# Altium PCB DiPho_AFE.PcbDoc (part 2 of 2)
Units mm, origin at the board's own origin, x right, y up, seen from the top; angles counter-clockwise.
Board outline 25.2 x 25.2 mm, 4 copper layers (Top Layer, Inner Layer 1, Inner Layer 2, Bottom Layer), stack 1.51 mm thick; 66 components, 49 nets, 237 pads, 102 vias.
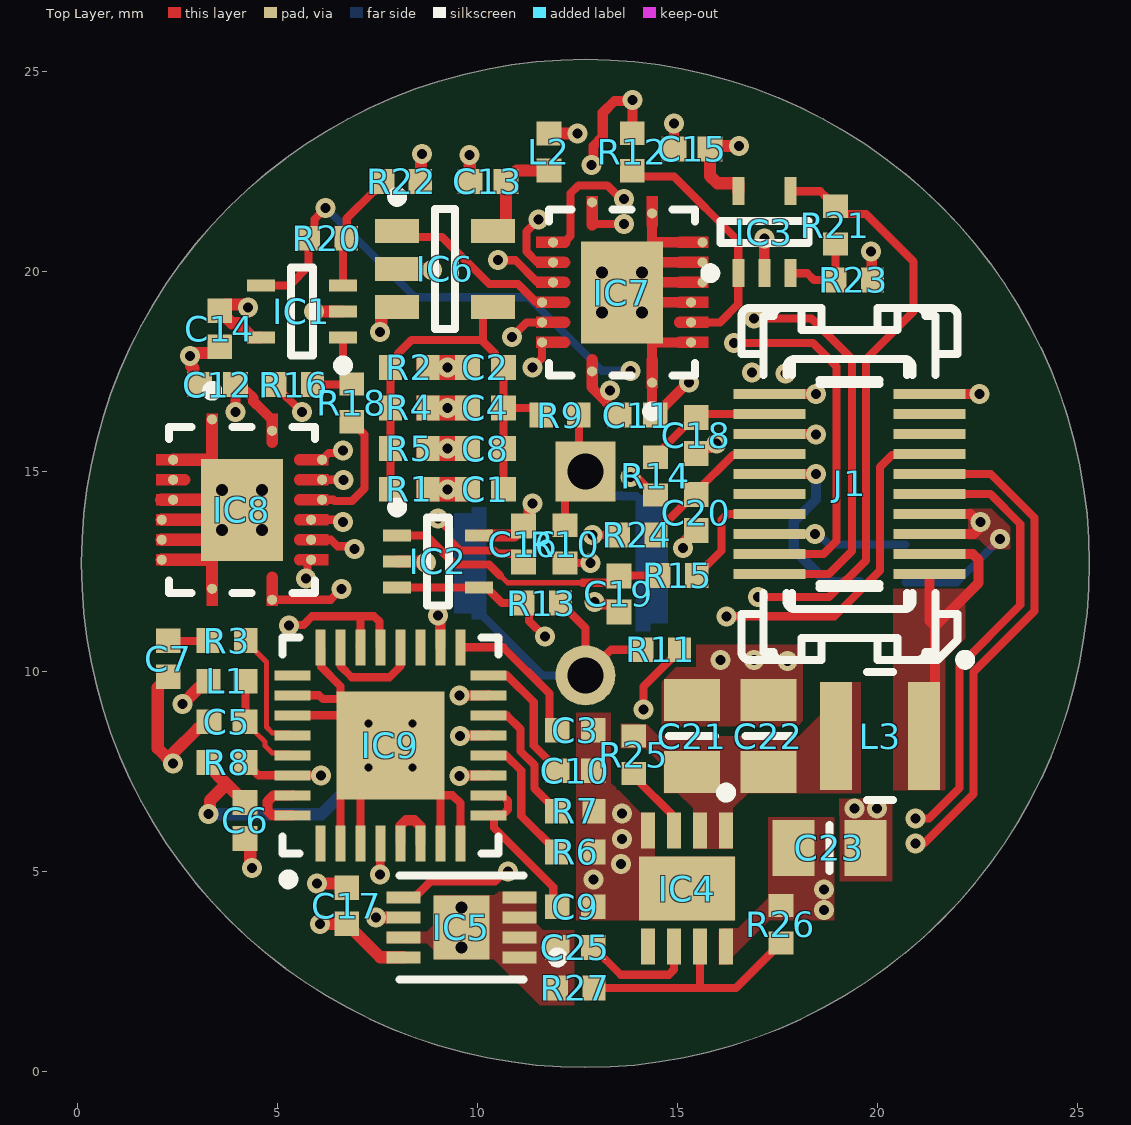
[diagram p0: Top Layer view]

## Via types
v1: diameter 0.5, hole 0.25, Top Layer to Bottom Layer, tented both sides, 88 vias
v2: diameter 0.6, hole 0.3, Top Layer to Bottom Layer, 10 vias
v3: diameter 0.5, hole 0.2, Top Layer to Bottom Layer, tented both sides, 4 vias

## Nets (pads, with @x,y where several pads share a name; then routed paths per layer and width w, separated by ;. In a path a pad name is that pad's centre, name@x,y a point inside that pad or via, vN(x,y) a via of type N, cw(c..) or ccw(c..) an arc to the next point about the centre after c; other vN are vias at no path point) (continued)
NetIC5_5: (continued)
  Top Layer w0.127: IC5.5@8.05,4.35 IC5.5 IC5.5@8.325,4.35 ; v1@10.736,4.97 v1(10.77,5.004)
  Top Layer w0.203: IC5.5@8.325,4.35 8.425,4.35 8.825,4.75 10.435,4.75 10.689,5.004 v1(10.77,5.004) ; v1(20.955,5.698) 21.161,5.698 22.403,6.939 22.403,9.987 23.927,11.511 23.927,13.843 22.834,14.936 J1.11
  Inner Layer 2 w0.203: v1(10.77,5.004) 12.903,2.87 18.871,2.87 20.898,4.897 20.898,5.641 v1(20.955,5.698)
NetIC5_6: IC5.6 J1.9 | length 28.6
  Top Layer w0.203: v1(20.955,6.325) 21.285,6.325 22.047,7.087 22.047,10.135 23.571,11.659 23.571,13.691 22.826,14.436 J1.9
  Top Layer w0.305: v1(7.465,3.85) 7.719,3.85
  Inner Layer 2 w0.203: v1(7.465,3.85) 8.193,3.85 9.826,5.482 10.968,5.482 13.25,3.2 18.72,3.2 20.244,4.724 20.244,5.969 20.588,6.313 20.944,6.313 v1(20.955,6.325)
NetIC6_1: IC6.1 IC7.13 | length 4.3
  Top Layer w0.203: IC6.1@7.995,20.864 9.118,20.864 10.294,19.688 11.018,19.688 11.478,19.228 IC7.13
NetIC7_9: IC7.9 IC8.9 J1.4 | length 31.5
  Top Layer w0.203: IC8.9 6.331,11.792 v1(6.604,12.065) ; IC7.9 12.857,21.718 12.857,21.303 12.976,21.184 v1(13.665,21.184) ; v1(16.408,18.212) 18.39,18.212 18.974,17.628 18.974,13.259 18.651,12.936 J1.4
  Inner Layer 2 w0.203: v1(6.604,12.065) 6.604,12.446 6.096,12.954 6.096,15.748 9.754,19.406 9.754,20.295 11.303,21.844 12.319,21.844 12.979,21.184 v1(13.665,21.184) 14.589,21.184 16.408,19.365 v1(16.408,18.212)
NetIC7_10: IC7.10 IC8.10 J1.2 | length 33.3
  Top Layer w0.203: v1(5.715,12.319) 5.748,12.352 5.748,12.685 5.842,12.779 IC8.10 ; IC7.10 12.168,20.728 12.328,20.888 12.328,21.954 12.522,22.149 13.247,22.149 13.585,21.811 v1(13.665,21.811) ; v1(16.916,18.821) 18.354,18.821 19.362,17.814 19.362,13.012 18.786,12.436 J1.2
  Inner Layer 2 w0.203: v1@5.715,12.332 v1(5.715,12.319) 5.74,12.344 5.74,15.895 9.398,19.553 9.398,20.447 11.176,22.225 12.446,22.225 12.86,21.811 v1(13.665,21.811) 14.537,21.811 16.916,19.431 v1(16.916,18.821)
NetIC9_4: IC9.4 R11.2 | length 11
  Top Layer w0.203: v1(7.569,4.925) 7.571,4.927 7.571,5.702 IC9.4 ; v1(14.151,9.052) 14.151,9.623 15.05,10.521 R11.2
  Inner Layer 2 w0.203: v1(7.569,4.925) 8.278,4.925 10.897,7.544 12.643,7.544 v1(14.151,9.052)
  Bottom Layer w0.203: v1(14.151,9.052) v1@14.164,9.04
NetIC9_5: IC9.5 IC9.6 | length 1.5
  Top Layer w0.254: IC9.5 8.075,5.705 8.075,6.145 8.212,6.282 8.422,6.282 8.571,6.133 8.571,5.705 IC9.6
NetIC9_12: IC9.12 R6.1 | length 3.4
  Top Layer w0.203: IC9.12 10.711,7.903 11.095,7.52 11.095,6.388 11.976,5.506 R6.1
NetIC9_14: IC9.14 R7.1 | length 3.4
  Top Layer w0.203: IC9.14 10.733,8.903 11.078,8.558 11.078,8.003 11.425,7.657 11.425,7.584 11.425,7.074 11.976,6.522 R7.1
NetIC9_20: IC9.20 IC9.23 | length 2.7
  Top Layer w0.203: IC9.23 6.573,10.14 6.858,9.855 7.798,9.855 8.073,10.131 IC9.20
NetIC9_28: IC9.28 R3.2 | length 3.1
  Top Layer w0.127: R3.2 4.207,10.752 4.724,10.235 4.724,8.611 4.87,8.465 5.312,8.465 IC9.28
NetIC9_30: IC9.30 R8.1 R10.2 | length 12.7
  Top Layer w0.203: R8.1 4.528,7.403 IC9.30 v1(6.083,7.403) ; R10.2 R10.2 12.826,12.712 v1(12.827,12.711)
  Inner Layer 2 w0.203: v1(6.083,7.403) 6.655,7.975 6.655,9.855 9.505,12.705 12.822,12.705 v1(12.827,12.711)
NetIC9_31: IC9.31 IC9.32 | length 1.6
  Top Layer w0.254: IC9.32 5.371,6.405 4.872,6.405 4.755,6.523 4.755,6.753 4.904,6.901 5.371,6.901 IC9.31
NetJ1_6: J1.6 R17.1 R19.2 | length 3.5
  Top Layer w0.203: J1.6 v1(18.441,13.436)
  Bottom Layer w0.203: v1(18.441,13.436) 18.521,13.436 18.787,13.17 R19.2 R17.1
NetJ1_8: J1.8 R15.1 | length 2.9
  Top Layer w0.203: R15.1 16.104,13.017 16.104,13.792 16.247,13.936 J1.8
P3V3: C11.2 C12.2 C17.2 IC5.8 IC7.16 IC8.16 J1.5 J1.7 R12.1 R17.2 | length 86.1
  Top Layer w0.254: v1(3.955,16.492) C12.2 4.138,16.987 4.247,16.987 4.396,16.839 4.396,16.755 4.613,16.538 4.867,16.284 IC8.16 ; v1(12.852,22.657) 12.899,22.704 12.899,23.134 13.132,23.366 13.132,23.967 13.426,24.262 13.852,24.262 v1(13.877,24.287) ; IC7.16 12.867,17.087 C11.2 ; R12.1@13.873,23.461 v1@13.873,24.283 ; J1.5 21.306,13.434 22.405,13.434 22.534,13.562 22.534,13.694 v1(22.581,13.741) 22.514,13.741 22.321,13.934 21.306,13.934 J1.7
  Top Layer w0.305: v1(6.063,3.69) C17.2 7.569,2.852 8.148,2.852 IC5.8
  Top Layer w0.406: R12.1 R12.1@13.873,23.461
  Inner Layer 1 w0.254: v1(12.852,22.657) 12.548,22.352 12.548,18.759 13.263,18.044 13.263,17.065 v1(13.31,17.018)
  Inner Layer 2 w0.406: v1(3.955,16.492) 1.234,16.492 1.115,16.373 1.046,16.304 0.952,16.013 0.728,15.081 0.578,14.135 0.503,13.179 0.503,12.221 0.577,11.281 0.578,11.265 0.728,10.319 0.948,9.402 0.952,9.387 1.243,8.49 1.248,8.475 1.609,7.604 1.615,7.59 2.05,6.736 2.551,5.919 3.114,5.143 3.726,4.427 3.737,4.414 4.414,3.737 4.469,3.69 v1(6.063,3.69) 6.063,2.69 6.063,2.521 6.216,2.368 6.736,2.05 7.59,1.615 8.475,1.248 9.387,0.952 9.402,0.948 10.319,0.728 11.265,0.578 12.221,0.503 13.179,0.503 14.135,0.578 15.081,0.728 16.013,0.952 16.925,1.248 17.81,1.615 18.664,2.05 19.481,2.551 19.494,2.56 20.257,3.114 20.986,3.737 21.663,4.414 22.286,5.143 22.849,5.919 23.35,6.736 23.357,6.75 23.785,7.59 24.152,8.475 24.448,9.387 24.672,10.319 24.822,11.265 24.829,11.359 24.829,11.544 24.71,11.663 v1(23.063,13.31) 23.038,13.31 22.624,13.723 22.599,13.723 v1(22.581,13.741) 22.581,15.367 24.075,16.861 24.075,17.11 23.785,17.81 23.35,18.664 23.342,18.678 22.849,19.481 22.286,20.257 21.663,20.986 20.986,21.663 20.257,22.286 19.481,22.849 18.664,23.35 17.81,23.785 17.796,23.791 16.925,24.152 16.509,24.287 v1(13.877,24.287)
  Bottom Layer w0.203: R17.2 21.984,12.23 v1(23.063,13.31)
P4V7: C14.2 C15.2 C16.2 C23.2 IC1.5 IC2.5 IC3.5 IC4.8 L1.2 L2.1 R26.2 | length 8.1
  Top Layer w0.203: L2.1 L2.1@11.787,23.446 ; v1@12.495,23.446 v1(12.497,23.444) ; C15.2 C15.2@15.893,23.139
  Top Layer w0.305: v1(2.624,9.18) 3.042,9.599 3.13,9.599 3.277,9.746 L1.2 ; v1(4.267,19.101) 4.336,19.17 3.709,19.17 C14.2 3.867,18.707 4.011,18.707 4.369,18.349 IC1.5 ; IC2.5 10.919,13.401 C16.2 11.308,13.79 11.308,14.079 11.379,14.15 v1(11.379,14.203) ; L2.1@11.787,23.446 v1@12.495,23.446 ; C15.2 15.817,22.385 15.999,22.203 16.518,22.203 16.52,22.201 IC3.5 ; C15.2@15.893,23.139 v1(16.535,23.139)
  other v1: 18.669,4.039 18.669,4.547 17.704,17.45 16.866,17.475
P5V0: J1.1 J1.3 L3.1 | length 7.6
  Top Layer w0.254: L3.1 21.439,8.655 21.439,11.127 ; J1.1 21.304,11.262 21.439,11.127 ; J1.3 21.306,12.934 22.381,12.934 22.53,12.785 22.53,12.217 21.439,11.127
PA4V7: C13.2 IC6.5 L2.2 | length 2.7
  Top Layer w0.305: IC6.5 10.564,21.016 10.712,21.164 C13.2 10.988,22.527 L2.2
PD_BIAS: IC2.3 IC2.4 J1.13 R13.2 | length 17.4
  Top Layer w0.203: IC2.3 10.242,12.101 10.29,12.052 10.29,12.036 10.617,11.709 R13.2 11.292,11.556 11.292,11.264 v1(11.684,10.871) ; v1(16.231,11.379) 18.923,11.379 20.066,12.522 20.066,15.113 20.366,15.413 21.281,15.413 J1.13
  Inner Layer 2 w0.203: v1(11.684,10.871) 12.04,11.227 15.998,11.227 16.15,11.379 v1(16.231,11.379)
TIA_OUTPUT: IC8.13 R18.1 | length 3
  Top Layer w0.203: IC8.13 6.402,14.292 6.431,14.263 6.869,14.263 7.179,14.573 7.179,15.923 R18.1
pads on no net: IC4.5 IC8.3 IC9.1 IC9.19 IC9.25 J1.10 J1.15 J1.17

## Polygon pours and split planes (outlines as drawn)
GND on Top Layer "PA3V3_L01_P-001" (solid, pour order 9): 19.05,6.827 20.371,6.827 20.371,4.75 19.05,4.75
GND on Top Layer "PA3V3_L01_P-001" (solid, pour order 7): 14.605,8.636 18.009,8.636 18.136,8.763 18.136,10.668 14.605,10.668
GND on Top Layer "PA3V3_L01_P-001" (solid, pour order 6): 8.903,4.399 10.419,4.399 10.516,4.496 11.476,4.496 11.476,3.699 11.644,3.531 12.421,3.531 12.421,1.651 11.557,1.651 10.409,2.799 8.903,2.799 8.903,3.035 8.738,3.2 7.736,3.2 7.736,3.498 8.731,3.498 8.903,3.671
GND on Top Layer "PA3V3_L01_P-001" (solid, pour order 5): 12.471,8.966 13.335,8.966 13.335,7.222 14.088,6.47 14.438,6.47 14.438,5.367 16.444,5.367 16.444,3.776 12.471,3.776
P4V7 on Top Layer "PA3V3_L01_P-001" (solid, pour order 2): 18.923,6.35 17.272,6.35 17.272,4.343 16.51,3.581 16.027,3.581 16.027,2.667 16.383,2.667 16.383,2.87 17.297,3.785 18.923,3.785
P3V3 on Top Layer "PA3V3_L01_P-001" (solid, pour order 3): 22.269,14.071 22.269,13.31 22.53,13.31 22.784,13.056 23.317,13.056 23.317,13.614 22.86,14.072
NetC21_2 on Top Layer "PA3V3_L01_P-001" (solid, pour order 1): 18.567,9.728 18.567,8.915 18.034,8.382 17.576,8.382 14.528,8.382 14.224,8.687 13.589,8.687 13.589,8.077 14.198,8.077 14.655,7.62 14.655,6.96 15.011,6.96 15.392,6.579 15.392,5.563 16.383,5.563 16.383,6.579 16.764,6.96 19.583,6.96 19.583,9.728
P5V0 on Top Layer "PA3V3_L01_P-001" (solid, pour order 0): 22.2,12.065 20.396,12.065 20.396,7.036 21.692,7.036 21.692,10.312 22.2,10.82
P4V7 on Inner Layer 2 "PA3V3_L01_P-001" (solid, pour order 4): 0,0 0,25.274 25.298,25.274 25.298,0
GND on Inner Layer 1 "PA3V3_L01_P-001" (solid, pour order 8): 0,0.063 0,25.337 25.298,25.337 25.298,0.063

## Other copper
Top Layer:
  rectangle net NetC2_2: 8.473,17.292 10.058,17.912
  rectangle net NetC1_2: 8.473,14.244 10.058,14.864
  rectangle net NetC8_2: 8.473,15.26 10.058,15.88
  rectangle net NetC4_2: 8.473,16.276 10.058,16.896

## Silkscreen, mask and mechanical layers (free items; w line width, h text height)
Bottom Overlay:
  text "DiPho AFE / v1.0" at 19.063,18.521 h1.3
  text "AFE TYPE" at 23.668,13.626 h1.5
  text "LOG" at 17.614,10.641 h1.3 r270
  text "TIA" at 21.145,10.641 h1.3 r270
  text "WUT ISE / 2021" at 19.063,2.521 h1
Mechanical 1:
  circle w0.1: c12.7,12.7 r12.6
Mechanical 15:
  circle w0.05: c12.7,12.7 r11.4

## Text inside footprints (layer, text, board x,y; h text height)
D1: Bottom Overlay "C" at 16.44,11.95 h1.3
D2: Bottom Overlay "C" at 11.95,15.9 h1.3 r270